# EAGLE board BLDC conmutation module (EAGLE 9.6.2)
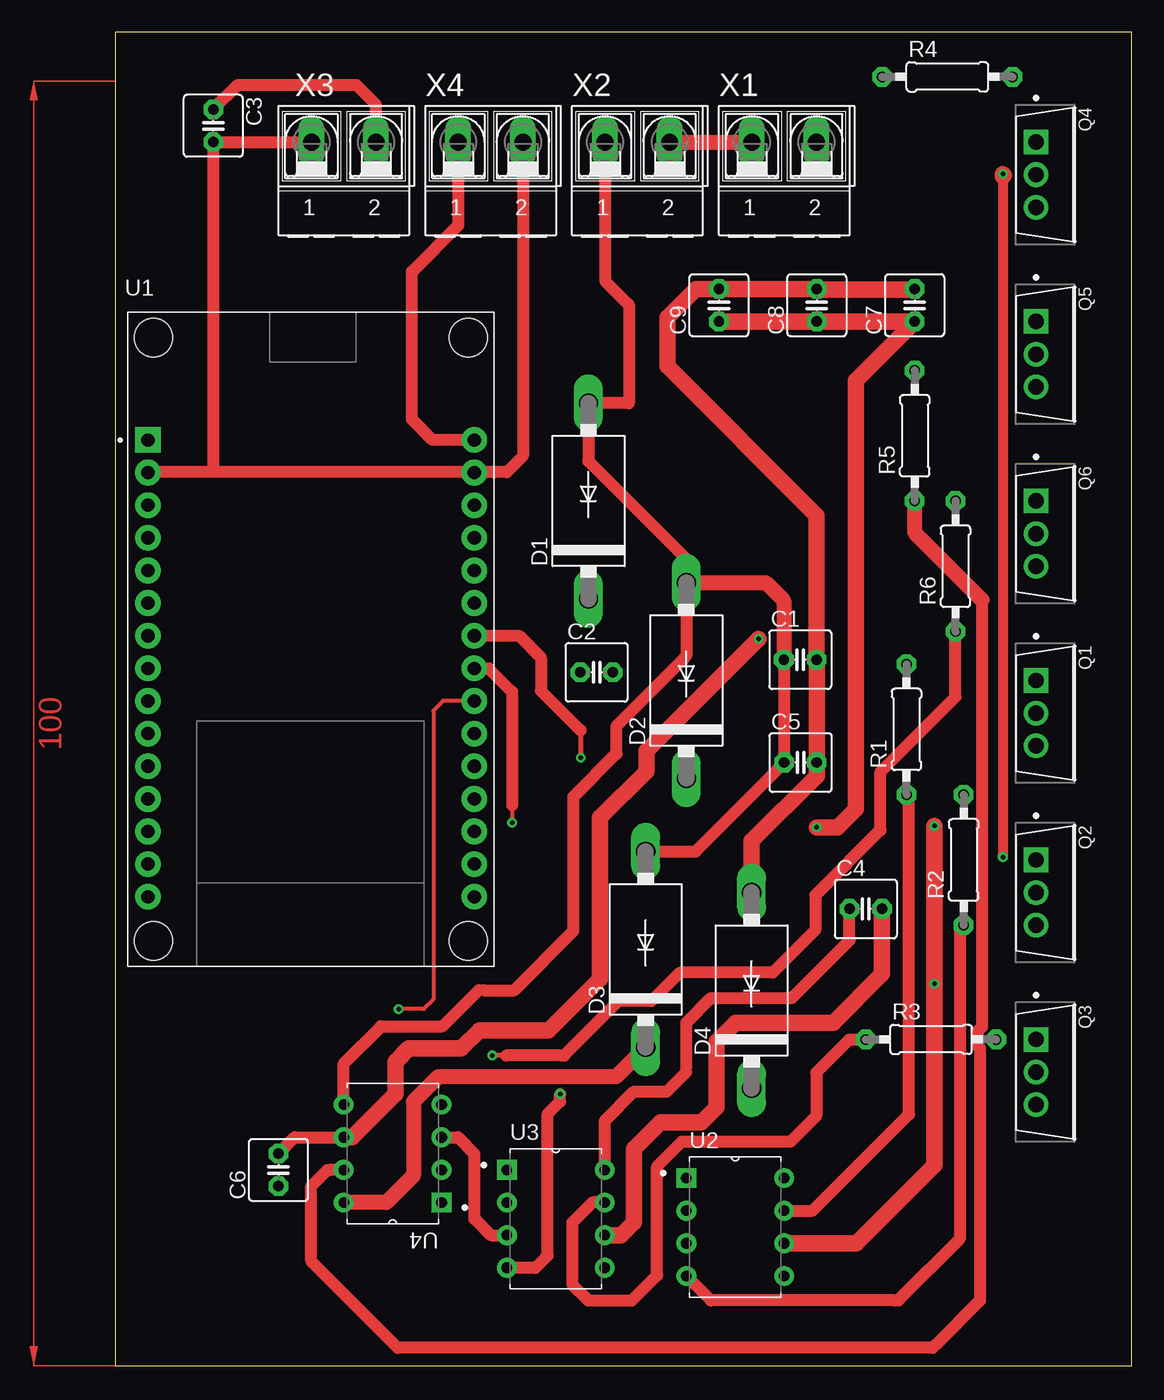
[diagram p0: board, top side]
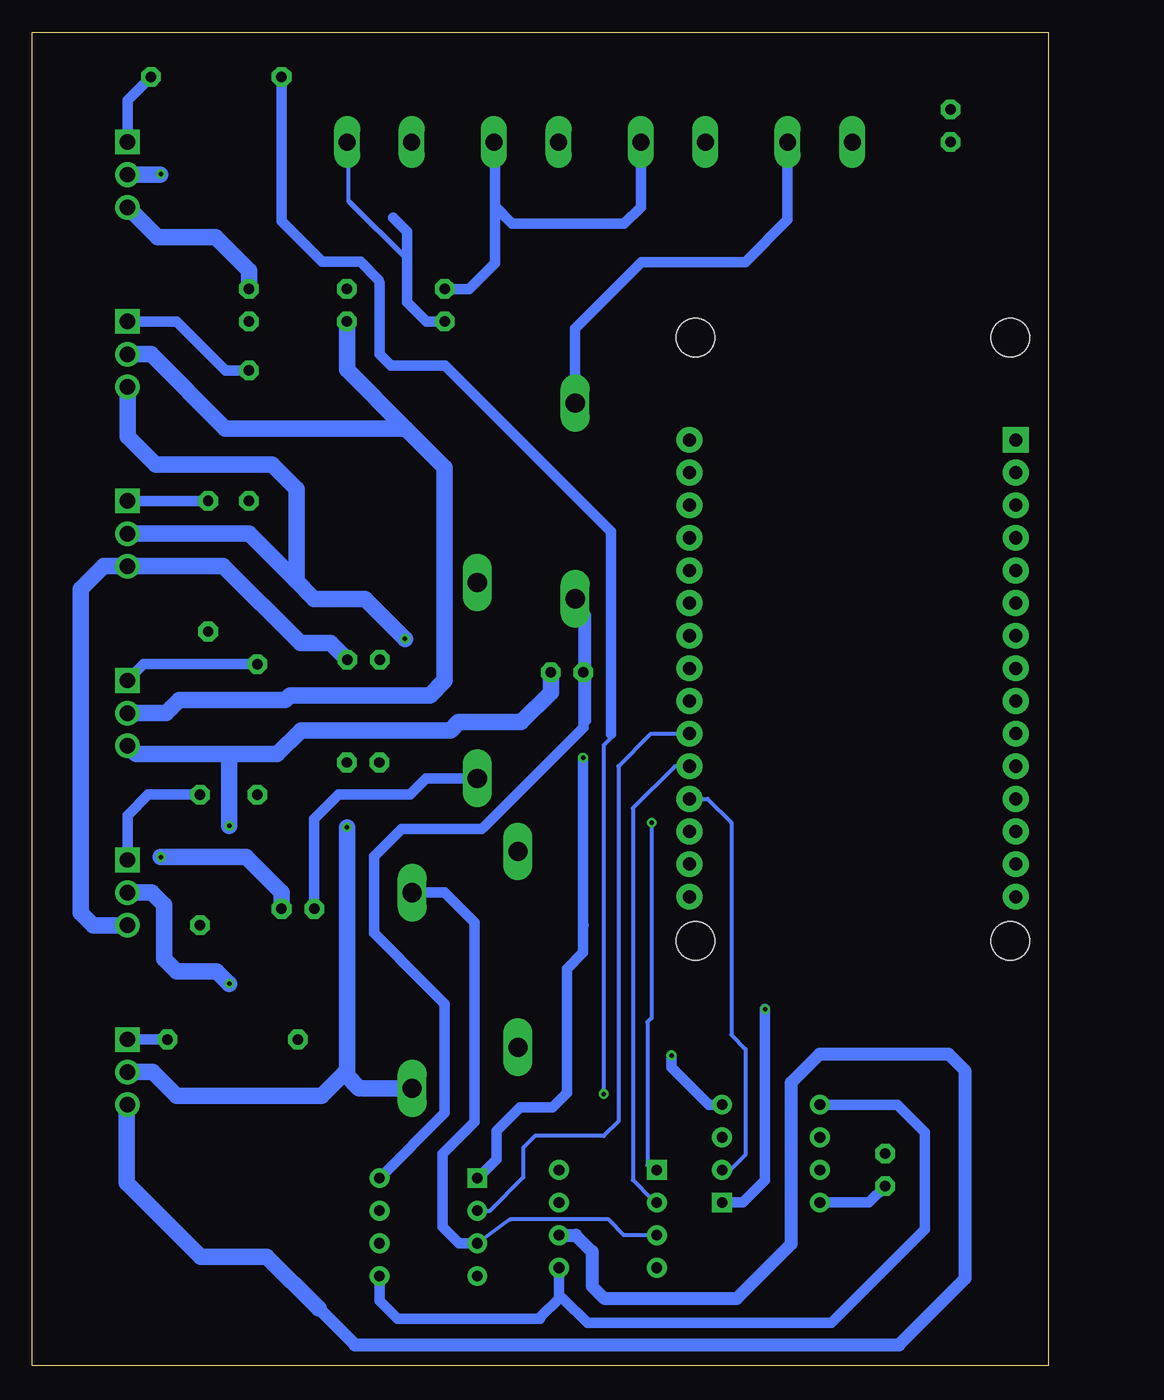
[diagram p1: board, bottom side, seen from below]

Size 79.11 x 103.81 mm. Coordinates in mm from the lower left corner, seen from the top.
Outline: 0,0 79.11,0 79.11,103.81 0,103.81 0,0
Copper layers (1*16): Top 0.035mm / dielectric 1.5mm / Bottom 0.035mm
Design rules "default *": minimum track width 0.32mm, minimum drill 0.35mm, track to track 6mil, track to pad 6mil, pad to pad 6mil, via to via 6mil, smd to smd 6mil, copper to edge 40mil, drill to drill 6mil, minimum pad ring 14mil, minimum via ring 8mil, stop-mask expansion 4mil, vias tented up to drill 0mil, thermal gap 10mil

## Footprints (pad centres in the part's own frame; a part is rotated, then mirrored left to right if it is on the bottom)
C025-050X050 = drill 0.813 octagon: 1 -1.27,0; 2 1.27,0
DO201-15 = drill 1.499 long: A 7.62,0; C -7.62,0
INFINEON_IRFB3077PBF_0 = drill 1.2 pad 1.85 square: 1 -0.705,2.54 | drill 1.2 pad 1.85: 2 -0.705,0; 3 -0.705,-2.54
0207/10 = drill 0.813 octagon: 1 -5.08,0; 2 5.08,0
MODULE_ESP32_DEVKIT_V1 = drill 1.02 pad 2 square: 1 -12.7,15.515 | drill 1.02 pad 2: 2 -12.7,12.975; 3 -12.7,10.435; 4 -12.7,7.895; 5 -12.7,5.355; 6 -12.7,2.815; 7 -12.7,0.275; 8 -12.7,-2.265; 9 -12.7,-4.805; 10 -12.7,-7.345; 11 -12.7,-9.885; 12 -12.7,-12.425; 13 -12.7,-14.965; 14 -12.7,-17.505; 15 -12.7,-20.045; 16 12.7,-20.045; 17 12.7,-17.505; 18 12.7,-14.965; 19 12.7,-12.425; 20 12.7,-9.885; 21 12.7,-7.345; 22 12.7,-4.805; 23 12.7,-2.265; 24 12.7,0.275; 25 12.7,2.815; 26 12.7,5.355; 27 12.7,7.895; 28 12.7,10.435; 29 12.7,12.975; 30 12.7,15.515 | hole 3: -12.28,-23.475; 12.23,-23.475; 12.23,23.475; -12.28,23.475
DIP762W45P254L1092H533Q8 = drill 0.83 square: 1 -3.81,3.81 | drill 0.83: 2 -3.81,1.27; 3 -3.81,-1.27; 4 -3.81,-3.81; 5 3.81,-3.81; 6 3.81,-1.27; 7 3.81,1.27; 8 3.81,3.81
AK500/2-H = drill 1.321 long: 1 -2.515,0; 2 2.515,0

## Placement (x,y rotation side)
C1  1nF  [C025-050X050]  53.31,54.97 0 top
C2  1nF  [C025-050X050]  37.47,53.98 0 top
C3  1nF  [C025-050X050]  7.62,96.52 270 top
C4  1nF  [C025-050X050]  58.42,35.56 0 top
C5  1nF  [C025-050X050]  53.34,46.96 0 top
C6  1nF  [C025-050X050]  12.7,15.24 90 top
C7  480uF  [C025-050X050]  62.23,82.55 90 top
C8  480uF  [C025-050X050]  54.61,82.55 90 top
C9  480uF  [C025-050X050]  46.99,82.55 90 top
D1  1N5400  [DO201-15]  36.83,67.31 90 top
D2  1N5400  [DO201-15]  44.45,53.34 90 top
D3  1N5400  [DO201-15]  41.29,32.41 90 top
D4  1N5400  [DO201-15]  49.53,29.21 90 top
Q1  INFINEON_IRFB3077PBFINFINEON_IRFB3077PBF_0_0  [INFINEON_IRFB3077PBF_0]  72.39,50.8 0 top
Q2  INFINEON_IRFB3077PBFINFINEON_IRFB3077PBF_0_0  [INFINEON_IRFB3077PBF_0]  72.39,36.83 0 top
Q3  INFINEON_IRFB3077PBFINFINEON_IRFB3077PBF_0_0  [INFINEON_IRFB3077PBF_0]  72.39,22.86 0 top
Q4  INFINEON_IRFB3077PBFINFINEON_IRFB3077PBF_0_0  [INFINEON_IRFB3077PBF_0]  72.39,92.71 0 top
Q5  INFINEON_IRFB3077PBFINFINEON_IRFB3077PBF_0_0  [INFINEON_IRFB3077PBF_0]  72.39,78.74 0 top
Q6  INFINEON_IRFB3077PBFINFINEON_IRFB3077PBF_0_0  [INFINEON_IRFB3077PBF_0]  72.39,64.77 0 top
R1  100  [0207/10]  61.58,49.53 90 top
R2  100  [0207/10]  66.04,39.37 90 top
R3  100  [0207/10]  63.5,25.4 0 top
R4  100  [0207/10]  64.77,100.33 0 top
R5  100  [0207/10]  62.23,72.39 90 top
R6  100  [0207/10]  65.41,62.23 90 top
U1  ESP32-DEVKIT-V1  [MODULE_ESP32_DEVKIT_V1]  15.24,56.55 0 top
U2  IR2183  [DIP762W45P254L1092H533Q8]  48.26,10.8 0 top
U3  IR2183  [DIP762W45P254L1092H533Q8]  34.29,11.43 0 top
U4  IR2183  [DIP762W45P254L1092H533Q8]  21.59,16.51 180 top
X1  [AK500/2-H]  52.07,95.25 0 top
X2  [AK500/2-H]  40.64,95.25 0 top
X3  [AK500/2-H]  17.78,95.25 0 top
X4  [AK500/2-H]  29.21,95.25 0 top

## Library data of the parts
C1-C9 = rcl; SPICEPREFIX: C
D1-D4 = diode
Q1-Q6 = Infineon - IRFB3077PBF; AUTOMOTIVE: No; CENTROID_NOT_SPECIFIED: No; CONTINUOUS_DRAIN_CURRENT: 210A; DATASHEET: https://www.infineon.com/dgdl/Infineon-IRFB3077-DataSheet-v01_01-EN.pdf?fileId=5546d462533600a4015356153f0d1def; DEPLETION_MODE: False; DEVICE_CLASS_L1: Discrete Semiconductors; DEVICE_CLASS_L2: Transistors; DEVICE_CLASS_L3: MOSFETs; DIGIKEY_DESCRIPTION: MOSFET N-CH 75V 120A TO220AB; DIGIKEY_PART_NUMBER: IRFB3077PBF-ND; DRAIN_TO_SOURCE_BREAKDOWN_VOLTAGE: 75V; DRAIN_TO_SOURCE_RESISTANCE: 2.8mΩ; DRAIN_TO_SOURCE_VOLTAGE: 75V; FOOTPRINT_URL: https://www.infineon.com/cms/en/product/packages/PG-TO220/PG-TO220-3-904/; FOOTPRINT_VARIANT_NAME_0: Recommended_Land_Pattern; GATE_CHARGE_AT_VGS: 160nC @ 10V; GATE_TO_SOURCE_VOLTAGE: 20V; HEIGHT: 19.15mm; INPUT_CAPACITACE_AT_VDS: 9400pF @ 50V; LEAD_FREE: Yes; MAX_FORWARD_DIODE_VOLTAGE: 1.3V; MAX_JUNCTION_TEMP: +175°C; MF: Infineon; MFG_PACKAGE_IDENT: PG-TO220-3; MFG_PACKAGE_IDENT_COMPONENT_ID: 23a5373a371ebf18; MFG_PACKAGE_IDENT_DATE: 0; MFG_PACKAGE_IDENT_REV: 904; MOUSER_PART_NUMBER: 942-IRFB3077PBF; MPN: IRFB3077PBF; NUMBER_OF_CHANNELS: 1; NUMBER_OF_N_CHANNELS: 1; PACKAGE: TO-220AB; POWER_DISSIPATION: 370W; PREFIX: Q; PULSE_DRAIN_CURRENT: 850A; REVERSE_RECOVERY_CHARGE: 59nC; REVERSE_RECOVERY_TIME: 42ns; ROHS: Yes; RTHJA_MAX: 62°C/W; STANDOFF_HEIGHT: 3.56mm; TECHNOLOGY: NA; TEMPERATURE_RANGE_HIGH: +175°C; TEMPERATURE_RANGE_LOW: -55°C; THRESHOLD_VGS_MAX: 4V; THRESHOLD_VGS_MIN: 2V; TURN_OFF_DELAY_TIME: 69ns; TURN_ON_DELAY_TIME: 25ns; VERIFICATION_VERSION: 0.0.0.3
R1-R6 = rcl; SPICEPREFIX: R
U1 = ESP32-DEVKIT-V1; AVAILABILITY: Not in stock; DESCRIPTION: Dual core, Wi-Fi: 2.4 GHz up to 150 Mbits/s,BLE (Bluetooth Low Energy) and legacy Bluetooth, 32 bits, Up to 240 MHz; MF: Do it; MP: ESP32-DEVKIT-V1; PACKAGE: None; PRICE: None
U2-U4 = IR2183; AVAILABILITY: In Stock; DESCRIPTION: Half-Bridge Gate Driver IC Inverting, Non-Inverting 14-SOIC; MF: Infineon; MP: IR2183; PACKAGE: DIP-8 International Rectifier; PRICE: None; PURCHASE-URL: https://pricing.snapeda.com/search/part/IR2183/?ref=eda
X1-X4 = con-ptr500; OC_FARNELL: unknown; OC_NEWARK: unknown

## Nets
GND: C1.2 C3.2 C5.2 C7.2 C8.2 C9.2 D4.A Q2.3 Q4.3 Q6.3 U1.2 U1.29 U2.3 U3.3 U4.3 X1.1 X2.2 X3.1 X4.2
HALL_A: U1.27
HALL_B: U1.26
HALL_C: U1.25
HIN_1: U1.24 U2.1
HIN_2: U1.23 U3.1
HIN_3: U1.22 U4.1
HO_1: R1.1 U2.7
HO_2: R3.1 U3.7
HO_3: R5.1 U4.7
LIN_1: U1.21 U2.2
LIN_2: U1.20 U3.2
LIN_3: U1.19 U4.2
LO_1: R2.1 U2.4
LO_2: R4.1 U3.4
LO_3: R6.1 U4.4
N$1: C4.1 D2.C U3.8
N$2: C6.1 D3.C U4.8
N$3: C2.1 D1.C U2.8
N$6: Q3.1 R3.2
N$7: Q1.1 R1.2
N$8: Q2.1 R2.2
N$9: Q4.1 R4.2
N$11: Q5.1 R5.2
N$12: Q6.1 R6.2
PHASE_1: C2.2 Q1.3 Q2.2 U2.6
PHASE_2: C4.2 Q3.3 Q4.2 U3.6
PHASE_3: C6.2 Q5.3 Q6.2 U4.6
RAW_VCC: C7.1 C8.1 C9.1 D4.C Q1.2 Q3.2 Q5.2 X1.2
THROTTLE: U1.28
VCC_5V: U1.30 X4.1
VCC_15V: C1.1 C3.1 C5.1 D1.A D2.A D3.A U2.5 U3.5 U4.5 X2.1 X3.2

## Tracks (layer width: path | path; a pad name or v marks a point on that pad's centre or on a via)
GND
  Top 0.32: 27.94,11.43 27.99,11.38 | 27.94,16.51 27.94,16.26 | C9.2 47.14,83.72 54.46,83.72 54.55,83.78 C8.2 55.27,83.72 61.77,83.72 C7.2 | 8.15,69.57 27.9,69.57 U1.29 | U1.2 2.58,69.57 | 8.13,95.1 7.8,95.2 C3.2
  Top 0.381: 29.46,69.56 27.98,69.56 U1.29
  Top 0.914: X4.2 31.73,70.81 30.48,69.56 29.46,69.56 29.46,69.57 8.15,69.57 7.59,69.57 | 7.59,69.57 2.58,69.57 | 7.59,69.57 7.62,69.59 C3.2 X3.1 | U4.3 26.67,17.78 27.94,16.51 | 27.94,16.26 27.94,11.43 | 27.99,11.38 29.21,10.16 U3.3
  Top 1.168: X2.2 X1.1
  Top 1.27: C7.2 62.19,83.78 54.55,83.78 | C8.2 C9.2 45.21,83.82 42.98,81.59 42.98,77.8 54.59,66.19 C1.2 54.61,54.94 C5.2 54.61,45.92 49.53,40.84 D4.A
  Bottom 0.32: U3.3 33.02,10.16 34.24,11.38 41.9,11.38 U2.3 | 72.5,34.29 Q2.3 | 54.73,55.27 C1.2 | 46.33,83.72 C9.2 | 43.08,95.1 X2.2
  Bottom 0.381: 43.18,90.17 41.91,88.9 33.02,88.9 | 43.18,90.17 43.18,95.23 X2.2 | 43.18,90.17 43.18,85.73 43.19,85.71
  Bottom 0.813: C9.2 45.09,83.82 43.19,85.71 | 43.18,85.73 43.08,85.83 43.08,90.25 | 43.08,90.25 43.08,95.1 | X4.2 31.73,90.2 33.02,88.9 41.73,88.9 43.08,90.25 | D4.A 46.99,36.83 44.65,34.49 44.65,19 47.14,16.51 47.14,10.8 45.87,9.53 U2.3
  Bottom 1.27: Q4.3 69.35,87.83 64.82,87.83 62.23,85.24 C7.2 | C1.2 55.86,56.24 58.23,56.24 64.25,62.26 71.66,62.26 Q6.3 73.52,62.23 75.31,60.44 75.31,35.23 74.34,34.26 71.71,34.26 Q2.3
HIN_1  (via drill 0.35)
  Top 0.381: 36.22,49.45 v36.22,47.32 | 33.13,52.54 33.22,52.45
  Top 0.914: U1.24 31.41,56.82 33.13,55.11 33.13,52.54 | 33.22,52.45 36.22,49.45
  Bottom 0.32: v36.22,47.32 36.22,38.43
  Bottom 0.381: 36.2,34.29 36.2,38.41 36.22,38.43
  Bottom 0.813: U2.1 42.98,16.08 42.98,18.29 41.15,20.12 38.61,20.12 37.49,21.23 37.49,30.89 36.22,32.16 36.22,34.32 | 36.2,34.29 36.22,34.32 | v36.22,47.32 36.22,34.32
HIN_2  (via drill 0.35)
  Top 0.32: 30.89,52.45 30.89,52.15 | 30.89,43.61 v30.89,42.27
  Top 0.914: U1.23 29.05,54.28 30.89,52.45 | 30.89,52.15 30.89,43.61
  Bottom 0.32: v30.89,42.27 30.89,27.07 31.21,26.75 31.21,15.61 U3.1
HIN_3  (via drill 0.35)
  Top 0.32: v22.05,27.76 24,27.76 24.77,28.52 24.77,51 25.51,51.74 U1.22
  Bottom 0.813: v22.05,27.76 22.05,14.42 23.77,12.7 U4.1
HO_1
  Top 0.32: 61.65,44.37 R1.1
  Top 0.914: 61.65,44.37 61.77,44.25 61.77,19.56 54.28,12.07 U2.7
HO_2
  Top 0.381: 42.16,7.04 42.16,7.11 | 35.56,11.13 35.56,11.07
  Top 0.914: U3.7 37.13,12.7 35.56,11.13 | 35.56,11.07 35.56,6.35 36.83,5.08 40.21,5.08 42.16,7.04 | 42.16,7.11 42.16,15.52 42.28,15.63 | 42.28,15.63 42.3,15.63 | 42.28,15.63 44.09,17.45 52.58,17.45 54.56,19.43 54.56,22.84 57.12,25.4 R3.1
HO_3
  Top 0.32: 63.79,1.56 63.62,1.39 63.6,1.39 | 15.32,8.05 15.24,8.13 | 16.66,15.24 16.51,15.24
  Top 0.914: R5.1 62.26,67.29 | 67.46,59.61 67.46,26.37 67.16,26.06 67.16,24.88 67.31,24.73 67.31,5.08 63.79,1.56 | 63.6,1.39 21.98,1.39 15.32,8.05 | 15.24,8.13 15.24,13.97 16.51,15.24 | U4.7 16.66,15.24
  Top 1.168: 67.46,59.61 62.26,64.82 62.26,67.29
LIN_1
  Bottom 0.32: U2.2 43.48,12.07 40.9,14.65 40.9,16.96 39.98,17.88 34.62,17.88 33.48,19.02 33.48,46.65 30.93,49.2 U1.21
LIN_2
  Bottom 0.32: U3.2 30.89,13.01 32.35,14.46 32.35,43.4 29.08,46.66 U1.20
LIN_3
  Bottom 0.32: U4.2 24.77,15.24 23.57,16.43 23.57,24.64 24.69,25.76 24.69,42.28 26.54,44.12 U1.19
LO_1
  Top 0.381: 60.96,5.08 60.66,5.08
  Top 0.914: R2.1 65.72,33.97 65.72,9.84 60.96,5.08 | 60.66,5.08 46.35,5.08 U2.4
LO_2  (via drill 0.35)
  Top 0.381: 33.52,8.44 33.66,8.58
  Top 0.914: 33.52,8.44 32.7,7.62 U3.4 | 33.66,8.58 33.66,19.61 34.62,20.57 v34.62,21.16
  Bottom 0.32: v34.62,21.16 34.62,48.3 34.06,48.86 34.06,49.17
  Bottom 0.381: 52.07,84.28 52.07,84.46 52.12,84.51
  Bottom 0.813: R4.1 59.69,89.08 56.54,85.93 53.54,85.93 52.12,84.51 | 52.07,84.28 52.07,78.74 51.17,77.84 46.95,77.84 34.06,64.95 34.06,49.17
LO_3  (via drill 0.35)
  Top 0.32: 54.48,36.61 54.6,36.73
  Top 0.381: 34.94,24.16 34.67,24.16 | 30.43,24.16 v29.34,24.16
  Top 0.914: 54.48,36.61 54.48,33.91 51.18,30.61 43.96,30.61 41.73,28.38 39.17,28.38 34.94,24.16 | 54.6,36.73 59.56,41.69 59.56,46.23 65.41,52.07 R6.1 | 34.67,24.16 30.43,24.16
  Bottom 0.32: 25.55,20.32 U4.4
  Bottom 0.813: v29.34,24.16 29.34,23.24 26.42,20.32 25.55,20.32
N$1
  Top 0.381: 44.45,23.19 44.45,22.86 44.4,22.86 42.88,21.34 | 46.38,28.63 46.46,28.63 | 52.65,28.63 52.45,28.63
  Top 0.914: U3.8 38.1,19.05 40.39,21.34 42.88,21.34 42.93,21.34 44.45,22.86 | 44.45,23.19 44.45,26.7 46.38,28.63 | 46.46,28.63 52.45,28.63 | 52.65,28.63 57.15,33.12 C4.1
  Bottom 0.32: 55.24,44.45 55.32,44.37
  Bottom 0.813: D2.C 48.44,45.72 49.71,44.45 55.24,44.45 | 55.32,44.37 57.15,42.55 C4.1
N$2
  Top 0.381: 20.83,12.7 21.1,12.7
  Top 0.914: 20.83,12.7 U4.8
  Top 1.168: D3.C 38.98,22.49 25.13,22.49 23.21,20.57 23.21,14.81 21.1,12.7 U4.8
  Bottom 0.813: C6.1 13.97,12.7 U4.8
N$3
  Bottom 0.32: 35.76,54.08 35.76,58.52 36.58,59.33 D1.C | 35.76,54.08 35.76,50.11 43.89,41.99 | 35.76,54.08 C2.1
  Bottom 0.813: D1.C 36.2,59.06 C2.1 36.2,49.68 43.89,41.99 44.11,41.77 50.35,41.77 52.48,39.65 52.48,33.68 50.49,31.7 50.49,31.67 46.99,28.17 46.99,19.69 U2.8
N$6
  Bottom 0.813: R3.2 Q3.1
N$7
  Bottom 0.813: R1.2 70.42,54.61 Q1.1
N$8
  Bottom 0.813: R2.2 70.08,44.45 71.69,42.84 Q2.1
N$9
  Bottom 0.813: R4.2 71.69,98.5 Q4.1
N$11
  Bottom 0.813: R5.2 64.06,77.47 67.87,81.28 68.15,81.28 Q5.1
N$12
  Bottom 0.813: R6.2 Q6.1
PHASE_1  (via drill 0.35)
  Top 1.27: U2.6 57.68,9.53 63.76,15.6 v63.76,29.74 v63.76,42.02
  Bottom 0.32: Q1.3 70.92,47.5 64.19,47.5
  Bottom 1.27: Q1.3 71.03,47.6 63.76,47.6 | 63.76,47.6 v63.76,42.02 | 63.76,47.6 60.03,47.6 58.18,49.45 46.55,49.45 45.91,50.1 41.05,50.1 38.73,52.41 C2.2 38.79,53.98 | v63.76,29.74 64.73,30.71 67.88,30.71 68.84,31.68 68.84,35.88 69.81,36.85 71.67,36.85 Q2.2
PHASE_2  (via drill 0.35)
  Top 0.381: 47.16,25.57 47.12,25.53 47.12,20.45 46.79,20.12
  Top 0.762: v69.09,92.76 v69.09,39.6
  Top 1.27: v69.09,92.76 69.17,92.68 69.09,92.6 | C4.2 59.69,30.48 55.88,26.67 48.26,26.67 47.16,25.57 | 47.12,25.53 46.79,25.2 46.79,20.12 45.63,18.96 42.45,18.96 40.36,16.87 40.36,11.15 39.37,10.16 U3.6
  Bottom 0.32: 69.14,92.71 v69.09,92.76
  Bottom 1.016: 56.81,4.45 53.98,1.62 11.64,1.62 6.46,6.79 6.46,22.95 7.76,24.24 17.82,24.24 20.03,22.03 20.03,9.46 24.28,5.22 34.55,5.22 35.51,6.19 35.51,8.87 36.81,10.16 U3.6
  Bottom 1.27: Q4.2 69.14,92.71 | Q3.3 71.75,20.25 71.75,14.22 66.01,8.48 60.84,8.48 56.81,4.45 | v69.09,39.6 62.46,39.6 59.69,36.83 C4.2
PHASE_3  (via drill 0.35)
  Top 0.32: 12.8,16.7 C6.2 | 37.74,36.83 37.74,42.66 | 41.52,48.02 41.35,47.86
  Top 0.381: 37.74,36.83 37.74,30.12
  Top 0.914: C6.2 13.97,17.78 U4.6
  Top 1.27: v50.08,56.58 41.52,48.02 | 41.35,47.86 41.35,46.27 37.74,42.66 37.74,30.12 33.74,26.12 28.35,26.12 26.92,24.68 22.83,24.68 21.81,23.67 21.81,21.18 18.41,17.78 U4.6
  Bottom 0.32: 72.34,65.02 Q6.2
  Bottom 0.381: 58.69,61.23 58.52,61.07 57.15,59.69
  Bottom 1.27: Q5.3 71.69,72.33 69.49,70.14 60.44,70.14 58.52,68.22 58.52,61.07 | Q6.2 62.23,64.77 58.69,61.23 57.15,59.69 53.19,59.69 v50.08,56.58
RAW_VCC  (via drill 0.35)
  Top 0.32: C9.1 C8.1 57.53,81.28 57.49,81.24 | 57.49,77.08 57.64,76.93
  Top 1.27: C9.1 57.53,81.28 C7.1 57.64,76.69 57.64,43.33 56.23,41.91 v54.61,41.91
  Bottom 0.32: 54.61,22.76 54.84,22.76 | 54.9,22.82 54.84,22.76 | 54.84,22.76 53.67,21.59 53.65,21.59 53.33,21.59 | 68.28,51.21 71.53,51.21 Q1.2 | 54.46,90.65 54.46,95.1 X1.2
  Bottom 0.381: v54.61,41.91 54.61,22.76 | 54.46,90.65 49.92,86.12 49.92,82.91 49.92,82.79
  Bottom 0.813: C9.1 48.41,81.28 49.92,82.79 | 49.92,82.91 49.92,88.28 51.03,89.38
  Bottom 1.27: Q5.2 69.85,78.74 64.06,72.95 50.04,72.95 | C8.1 54.61,77.52 50.04,72.95 | 50.04,72.95 46.99,69.9 46.99,53.34 48.14,52.19 59.04,52.19 59.41,51.82 67.66,51.82 68.28,51.21 68.68,50.8 Q1.2 | v54.61,41.91 54.61,22.55 53.65,21.59 | 53.33,21.59 D4.C | Q3.2 69.73,22.86 67.88,21.01 56.59,21.01 54.84,22.76
VCC_5V
  Top 0.914: X4.1 26.7,88.77 23.09,85.17 23.09,73.68 24.71,72.06 U1.30
VCC_15V
  Top 0.32: 37.11,74.93 D1.A | 39.92,82.64 39.98,82.58 | 44.21,63.02 44.21,63.1 36.83,70.49 | 44.44,62.56 44.44,62.79 | 35.66,44.28 35.66,35.56
  Top 0.381: 28.29,29.23 28.65,29.23 | 31.06,29.23 31.08,29.23 35.66,33.81 35.66,35.56 | 39.03,49.82 39.19,49.99 | 44.34,55.13 44.45,55.25 | 18.76,99.7 18.57,99.7
  Top 0.914: X3.2 20.3,98.16 18.76,99.7 | 18.57,99.7 9.53,99.7 C3.1 | X2.1 38.12,84.44 39.92,82.64 | 39.98,82.58 39.98,74.93 37.11,74.93 | D1.A 36.83,70.49 36.83,70.4 44.21,63.02 44.44,62.79 | 44.44,62.56 D2.A 44.45,55.25 | C1.1 52.05,46.98 C5.1 | C5.1 52.07,46.91 | C5.1 51.61,46.5 51.61,46.47 45.17,40.03 D3.A | U4.5 17.78,23.52 20.68,26.42 25.47,26.42 28.29,29.23 | 28.65,29.23 31.06,29.23 35.65,33.81 | 35.65,33.81 35.66,33.81 | 35.65,33.81 35.66,33.83 35.66,44.28 39.03,47.65 39.03,49.82 | 39.19,49.99 44.34,55.13
  Top 1.168: D2.A 50.64,60.96 52.05,59.56 C1.1
  Bottom 0.32: 39.43,3.65 39.57,3.65 | 20.3,88.9 20.3,89.21
  Bottom 0.381: 38.1,5.23 38.1,4.98 39.43,3.65
  Bottom 0.813: U2.5 52.07,5.07 50.65,3.65 39.57,3.65 39.57,3.75 38.1,5.23 | 38.1,5.23 U3.5 | 38.1,5.23 37.79,5.23 35.89,3.33 16.89,3.33 9.6,10.62 9.6,18.18 11.74,20.32 U4.5 | X3.2 20.3,89.21 23.6,85.9 31.67,85.9 36.83,80.75 D1.A
(copper drawn outside any net)
  shapes: Top area x1